# Altium PCB PMOD_KYPD.PcbDoc
Units mm, origin at the board's own origin, x right, y up, seen from the top; angles counter-clockwise.
Board outline 89.15 x 71.63 mm, 2 copper layers (Top Layer, Bottom Layer); 100 components, 14 nets, 240 pads, 0 vias.
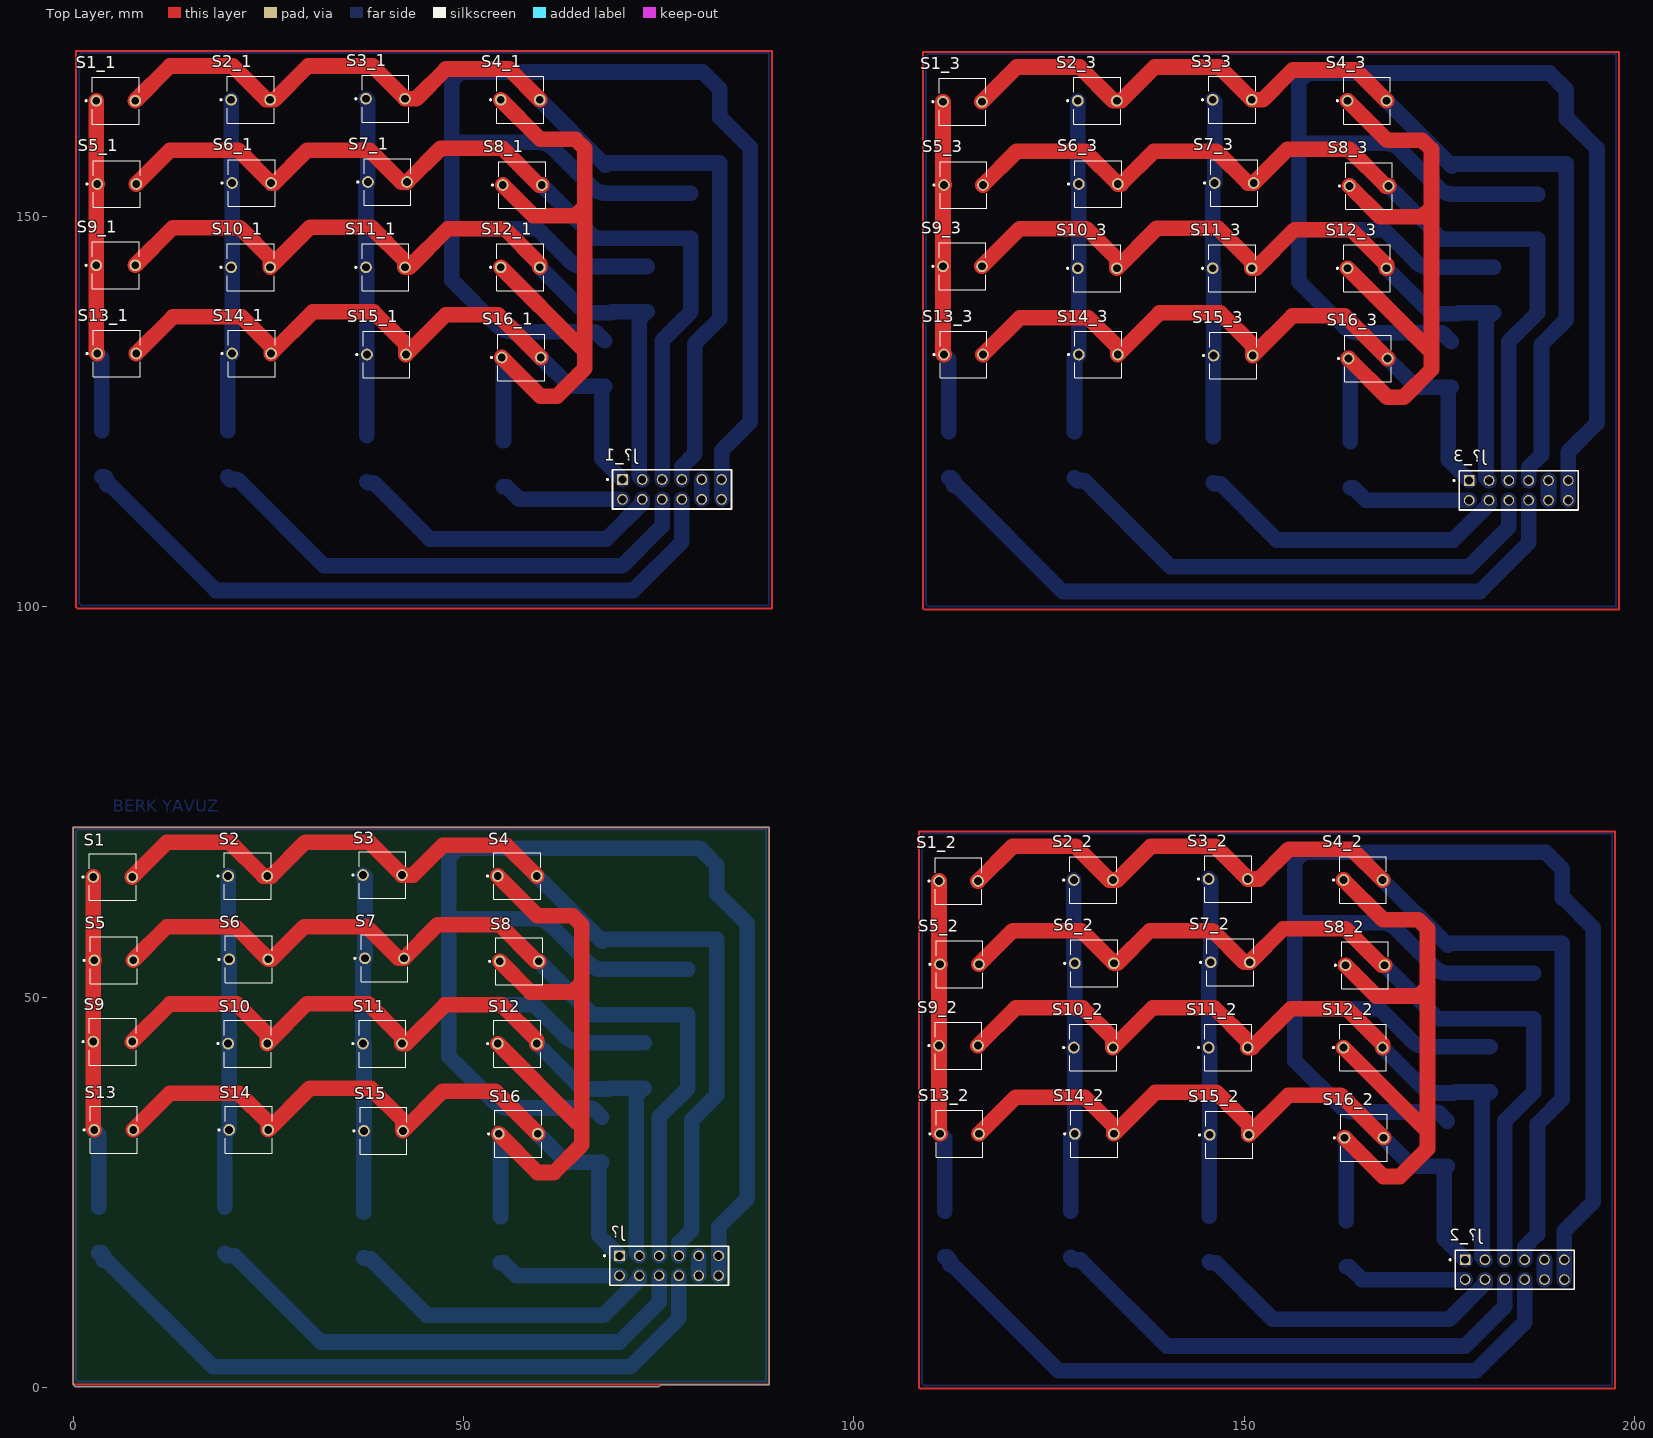
[diagram p0: Top Layer view]
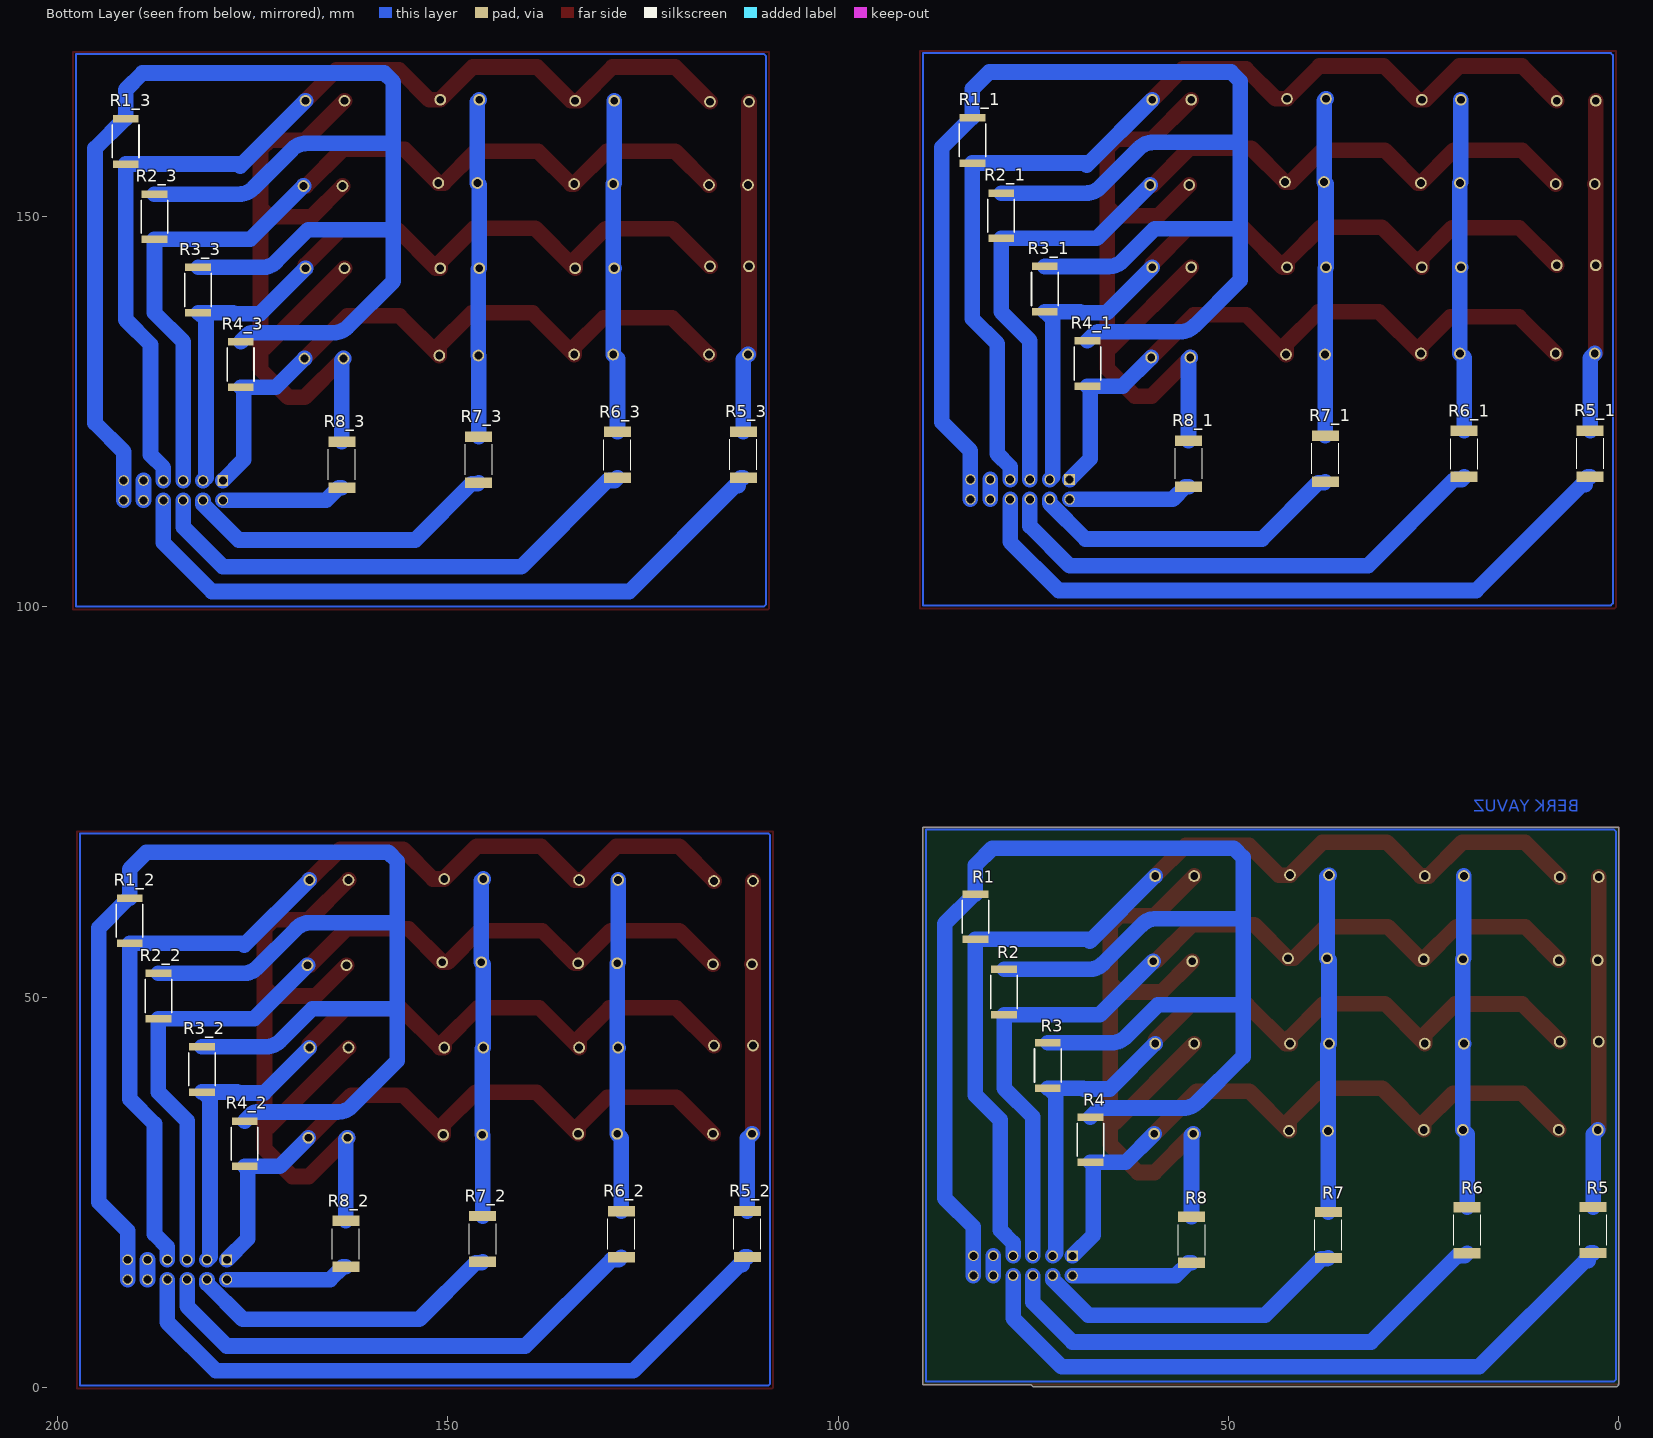
[diagram p1: Bottom Layer view, seen from below]

## Layer stack, top to bottom
Top Solder: solder mask 0.0102, Solder Resist, Dk 3.5
Top Layer: signal copper 0.0356
Dielectric 1: dielectric 0.32, FR-4, Dk 4.8
Bottom Layer: signal copper 0.0356
Bottom Solder: solder mask 0.0102, Solder Resist, Dk 3.5

## Board outline
0,0.381 0,71.755 89.154,71.755 89.154,0.381 75.311,0.381 75.057,0.127 0.254,0.127

## Design rules (kind name [scope] priority, off if disabled: settings)
Clearance [All] p1: gap=0.152 ignorepadtopadclearanceinfootprint=FALSE
HoleSize [All] p1: absolutevalues=TRUE maxlimit=5 minlimit=0.025 maxpercent=80.000 minpercent=20.000
PolygonConnect [All] p1: connectstyle=Relief reliefconductorwidth=0.254 reliefentries=4 polygonreliefangle="90 Angle" airgapwidth=0.254
RoutingVias [All] p1: holewidth=0.6 width=0.6 viastyle="Through Hole" minholewidth=0.2 minwidth=0.2 maxholewidth=0.9 maxwidth=1.27
SolderMaskExpansion [All] p1: expansion=0.102 istentingtop=FALSE
Width [All] p1: maxlimit=2 minlimit=0.152 preferedwidth=1
29 further rules are at their usual default settings.

## Classes and differential pairs
component class PMOD_KYPD: J? R1 R2 R3 R4 R5 R6 R7 R8 S1 S2 S3 S4 S5 S6 S7 S8 S9 S10 S11 S12 S13 S14 S15 S16

## Components (designator, comment, footprint, x,y, rotation, side; value= is the part's Value field where it differs from the comment)
J? "HTSW-106-07-L-D-LL" SAMTEC_HTSW-106-07-L-D-LL 76.327,15.621 r0 top
J?_1 "HTSW-106-07-L-D-LL" SAMTEC_HTSW-106-07-L-D-LL 76.708,115.062 r0 top (schematic designator J?)
J?_2 "HTSW-106-07-L-D-LL" SAMTEC_HTSW-106-07-L-D-LL 184.658,15.113 r0 top (schematic designator J?)
J?_3 "HTSW-106-07-L-D-LL" SAMTEC_HTSW-106-07-L-D-LL 185.166,114.935 r0 top (schematic designator J?)
R1 "CRGCQ2512J10K" FP-CRGCQ2512-IPC_C 82.423,60.325 r90 bottom value=10KΩ
R1_1 "CRGCQ2512J10K" FP-CRGCQ2512-IPC_C 82.804,159.766 r90 bottom value=10KΩ (schematic designator R1)
R1_2 "CRGCQ2512J10K" FP-CRGCQ2512-IPC_C 190.754,59.817 r90 bottom value=10KΩ (schematic designator R1)
R1_3 "CRGCQ2512J10K" FP-CRGCQ2512-IPC_C 191.262,159.639 r90 bottom value=10KΩ (schematic designator R1)
R2 "CRGCQ2512J10K" FP-CRGCQ2512-IPC_C 78.74,50.673 r90 bottom value=10KΩ
R2_1 "CRGCQ2512J10K" FP-CRGCQ2512-IPC_C 79.121,150.114 r90 bottom value=10KΩ (schematic designator R2)
R2_2 "CRGCQ2512J10K" FP-CRGCQ2512-IPC_C 187.071,50.165 r90 bottom value=10KΩ (schematic designator R2)
R2_3 "CRGCQ2512J10K" FP-CRGCQ2512-IPC_C 187.579,149.987 r90 bottom value=10KΩ (schematic designator R2)
R3 "CRGCQ2512J10K" FP-CRGCQ2512-IPC_C 73.152,41.275 r90 bottom value=10KΩ
R3_1 "CRGCQ2512J10K" FP-CRGCQ2512-IPC_C 73.533,140.716 r90 bottom value=10KΩ (schematic designator R3)
R3_2 "CRGCQ2512J10K" FP-CRGCQ2512-IPC_C 181.483,40.767 r90 bottom value=10KΩ (schematic designator R3)
R3_3 "CRGCQ2512J10K" FP-CRGCQ2512-IPC_C 181.991,140.589 r90 bottom value=10KΩ (schematic designator R3)
R4 "CRGCQ2512J10K" FP-CRGCQ2512-IPC_C 67.691,31.75 r90 bottom value=10KΩ
R4_1 "CRGCQ2512J10K" FP-CRGCQ2512-IPC_C 68.072,131.191 r90 bottom value=10KΩ (schematic designator R4)
R4_2 "CRGCQ2512J10K" FP-CRGCQ2512-IPC_C 176.022,31.242 r90 bottom value=10KΩ (schematic designator R4)
R4_3 "CRGCQ2512J10K" FP-CRGCQ2512-IPC_C 176.53,131.064 r90 bottom value=10KΩ (schematic designator R4)
R5 "470" RESC6332X70N 3.302,20.193 r270 bottom
R5_1 "470" RESC6332X70N 3.683,119.634 r270 bottom (schematic designator R5)
R5_2 "470" RESC6332X70N 111.633,19.685 r270 bottom (schematic designator R5)
R5_3 "470" RESC6332X70N 112.141,119.507 r270 bottom (schematic designator R5)
R6 "470" RESC6332X70N 19.431,20.17 r270 bottom
R6_1 "470" RESC6332X70N 19.812,119.611 r270 bottom (schematic designator R6)
R6_2 "470" RESC6332X70N 127.762,19.662 r270 bottom (schematic designator R6)
R6_3 "470" RESC6332X70N 128.27,119.484 r270 bottom (schematic designator R6)
R7 "470" RESC6332X70N 37.211,19.558 r270 bottom
R7_1 "470" RESC6332X70N 37.592,118.999 r270 bottom (schematic designator R7)
R7_2 "470" RESC6332X70N 145.542,19.05 r270 bottom (schematic designator R7)
R7_3 "470" RESC6332X70N 146.05,118.872 r270 bottom (schematic designator R7)
R8 "470" RESC6332X70N 54.737,18.923 r270 bottom
R8_1 "470" RESC6332X70N 55.118,118.364 r270 bottom (schematic designator R8)
R8_2 "470" RESC6332X70N 163.068,18.415 r270 bottom (schematic designator R8)
R8_3 "470" RESC6332X70N 163.576,118.237 r270 bottom (schematic designator R8)
S1 "1" SW_BUTT-2 5.08,65.405 r0 top
S1_1 "1" SW_BUTT-2 5.461,164.846 r0 top (schematic designator S1)
S1_2 "1" SW_BUTT-2 113.411,64.897 r0 top (schematic designator S1)
S1_3 "1" SW_BUTT-2 113.919,164.719 r0 top (schematic designator S1)
S2 "2" SW_BUTT-2 22.352,65.532 r0 top
S2_1 "2" SW_BUTT-2 22.733,164.973 r0 top (schematic designator S2)
S2_2 "2" SW_BUTT-2 130.683,65.024 r0 top (schematic designator S2)
S2_3 "2" SW_BUTT-2 131.191,164.846 r0 top (schematic designator S2)
S3 "3" SW_BUTT-2 39.624,65.659 r0 top
S3_1 "3" SW_BUTT-2 40.005,165.1 r0 top (schematic designator S3)
S3_2 "3" SW_BUTT-2 147.955,65.151 r0 top (schematic designator S3)
S3_3 "3" SW_BUTT-2 148.463,164.973 r0 top (schematic designator S3)
S4 "A" SW_BUTT-2 56.896,65.532 r0 top
S4_1 "A" SW_BUTT-2 57.277,164.973 r0 top (schematic designator S4)
S4_2 "A" SW_BUTT-2 165.227,65.024 r0 top (schematic designator S4)
S4_3 "A" SW_BUTT-2 165.735,164.846 r0 top (schematic designator S4)
S5 "4" SW_BUTT-2 5.207,54.737 r0 top
S5_1 "4" SW_BUTT-2 5.588,154.178 r0 top (schematic designator S5)
S5_2 "4" SW_BUTT-2 113.538,54.229 r0 top (schematic designator S5)
S5_3 "4" SW_BUTT-2 114.046,154.051 r0 top (schematic designator S5)
S6 "5" SW_BUTT-2 22.479,54.864 r0 top
S6_1 "5" SW_BUTT-2 22.86,154.305 r0 top (schematic designator S6)
S6_2 "5" SW_BUTT-2 130.81,54.356 r0 top (schematic designator S6)
S6_3 "5" SW_BUTT-2 131.318,154.178 r0 top (schematic designator S6)
S7 "6" SW_BUTT-2 39.878,54.991 r0 top
S7_1 "6" SW_BUTT-2 40.259,154.432 r0 top (schematic designator S7)
S7_2 "6" SW_BUTT-2 148.209,54.483 r0 top (schematic designator S7)
S7_3 "6" SW_BUTT-2 148.717,154.305 r0 top (schematic designator S7)
S8 "B" SW_BUTT-2 57.15,54.61 r0 top
S8_1 "B" SW_BUTT-2 57.531,154.051 r0 top (schematic designator S8)
S8_2 "B" SW_BUTT-2 165.481,54.102 r0 top (schematic designator S8)
S8_3 "B" SW_BUTT-2 165.989,153.924 r0 top (schematic designator S8)
S9 "7" SW_BUTT-2 5.08,44.323 r0 top
S9_1 "7" SW_BUTT-2 5.461,143.764 r0 top (schematic designator S9)
S9_2 "7" SW_BUTT-2 113.411,43.815 r0 top (schematic designator S9)
S9_3 "7" SW_BUTT-2 113.919,143.637 r0 top (schematic designator S9)
S10 "8" SW_BUTT-2 22.352,44.069 r0 top
S10_1 "8" SW_BUTT-2 22.733,143.51 r0 top (schematic designator S10)
S10_2 "8" SW_BUTT-2 130.683,43.561 r0 top (schematic designator S10)
S10_3 "8" SW_BUTT-2 131.191,143.383 r0 top (schematic designator S10)
S11 "9" SW_BUTT-2 39.624,44.069 r0 top
S11_1 "9" SW_BUTT-2 40.005,143.51 r0 top (schematic designator S11)
S11_2 "9" SW_BUTT-2 147.955,43.561 r0 top (schematic designator S11)
S11_3 "9" SW_BUTT-2 148.463,143.383 r0 top (schematic designator S11)
S12 "C" SW_BUTT-2 56.896,44.069 r0 top
S12_1 "C" SW_BUTT-2 57.277,143.51 r0 top (schematic designator S12)
S12_2 "C" SW_BUTT-2 165.227,43.561 r0 top (schematic designator S12)
S12_3 "C" SW_BUTT-2 165.735,143.383 r0 top (schematic designator S12)
S13 "*" SW_BUTT-2 5.207,33.02 r0 top
S13_1 "*" SW_BUTT-2 5.588,132.461 r0 top (schematic designator S13)
S13_2 "*" SW_BUTT-2 113.538,32.512 r0 top (schematic designator S13)
S13_3 "*" SW_BUTT-2 114.046,132.334 r0 top (schematic designator S13)
S14 "0" SW_BUTT-2 22.479,33.02 r0 top
S14_1 "0" SW_BUTT-2 22.86,132.461 r0 top (schematic designator S14)
S14_2 "0" SW_BUTT-2 130.81,32.512 r0 top (schematic designator S14)
S14_3 "0" SW_BUTT-2 131.318,132.334 r0 top (schematic designator S14)
S15 "#" SW_BUTT-2 39.751,32.893 r0 top
S15_1 "#" SW_BUTT-2 40.132,132.334 r0 top (schematic designator S15)
S15_2 "#" SW_BUTT-2 148.082,32.385 r0 top (schematic designator S15)
S15_3 "#" SW_BUTT-2 148.59,132.207 r0 top (schematic designator S15)
S16 "D" SW_BUTT-2 57.023,32.512 r0 top
S16_1 "D" SW_BUTT-2 57.404,131.953 r0 top (schematic designator S16)
S16_2 "D" SW_BUTT-2 165.354,32.004 r0 top (schematic designator S16)
S16_3 "D" SW_BUTT-2 165.862,131.826 r0 top (schematic designator S16)

## Footprints (in the part's own frame and the unit in brackets; to place one, negate y for a bottom-side part, rotate by r counter-clockwise, add the part's x,y. Pads: shape width x height; smd on the part's side, far side on the other; paste and mask are expansions set on the pad)
FP-CRGCQ2512-IPC_C [mm]
  rect 0.958x3.306 smd paste+0 mask+0: 1(-2.902,0) 2(2.902,0)
  silkscreen extent -2.12,-1.7 2.12,1.7, body extent -3.17,-1.6 3.17,1.6, height 0.65
RESC6332X70N [mm]
  rect 1.33x3.46 smd: 1(-2.944,0) 2(2.944,0)
  silkscreen extent -1.96,-1.73 1.96,1.73, body extent -3.15,-1.6 3.15,1.6, height 0.7
SAMTEC_HTSW-106-07-L-D-LL [mm]
  rect 1.37x1.37 hole 1.02: 01(-6.35,1.27)
  round 1.37 hole 1.02: 02(-6.35,-1.27) 03(-3.81,1.27) 04(-3.81,-1.27) 05(-1.27,1.27) 06(-1.27,-1.27) 07(1.27,1.27) 08(1.27,-1.27) 09(3.81,1.27) 10(3.81,-1.27) 11(6.35,1.27) 12(6.35,-1.27)
  silkscreen extent -8.37,-2.51 7.62,2.51
SW_BUTT-2 [mm]
  round 1.508 hole 1: 1(-2.5,0) 2(2.5,0)
  silkscreen extent -3.9,-3 3,3

## Part data
J? J?_1 J?_2 J?_3: Package=None, Availability=Unavailable, MF="{'manufacturer': u'Samtec'}", MP=HTSW-106-07-L-D-LL, Price=None
R1 R1_1 R1_2 R1_3 R2 R2_1 R2_2 R2_3 R3 R3_1 R3_2 R3_3 R4 R4_1 R4_2 R4_3: library part CMP-03211-000044-1, "CRGCQ2512 10KΩ 1W ±100ppm/°C 5%200V", Manufacturer="TE Connectivity", Package=CRGCQ2512, Power Rating=1W, Resistance=10KΩ, Temperature="-55°C to +155°C", Temperature Coefficient=±100ppm/°C, Temperature Range High=+155°C, Temperature Range Low=-55°C, Tolerance=0.05, Voltage Rating=200V, Automotive=Yes, Automotive Grade="Grade 0", Category=Res, ComponentLink2Description=Datasheet, ComponentLink2URL=https://www.te.com/commerce/DocumentDelivery/DDEController?Action=showdoc&DocId=Data+Sheet%7F1773204-3%7F1%7Fpdf%7FEnglish%7FENG_DS_1773204-3_1.pdf%7F4-2176349-923, Composition="Thick Film", Device Class L1="Passive Components", Device Class L2=Resistors, Device Class L3="Chip SMD Resistors", Height=0.65mm, Ipc Land Pattern Name=RESC635320X55, Lead Free=Yes, Manufacturer Part Number=CRGCQ2512J10K, Octopart=https://octopart.com/crgcq2512j10k-te+connectivity-91018617, RoHS=TRUE, Series=CRGCQ
R5 R5_1 R5_2 R5_3 R6 R6_1 R6_2 R6_3 R7 R7_1 R7_2 R7_3 R8 R8_1 R8_2 R8_3: library part RMCF2512FT470R, Package=None, Availability=Unavailable, MF="{'manufacturer': u'Stackpole Electronics Inc'}", MP=RMCF2512FT470R, Price=None
S1 S1_1 S1_2 S1_3 S2 S2_1 S2_2 S2_3 S3 S3_1 S3_2 S3_3 S4 S4_1 S4_2 S4_3 S5 S5_1 S5_2 S5_3 S6 S6_1 S6_2 S6_3 S7 S7_1 S7_2 S7_3 S8 S8_1 S8_2 S8_3 S9 S9_1 S9_2 S9_3 S10 S10_1 S10_2 S10_3 S11 S11_1 S11_2 S11_3 S12 S12_1 S12_2 S12_3 S13 S13_1 S13_2 S13_3 S14 S14_1 S14_2 S14_3 S15 S15_1 S15_2 S15_3 S16 S16_1 S16_2 S16_3: library part BUTT-2, "Tactile Switches MINI PUSH BUTTON SWITCH 2-PIN QTY. 4", Package=None, Availability=Unavailable, MF="{'manufacturer': u'Gravitech'}", MP=BUTT-2, Price=None

## Nets (pads, with @x,y where several pads share a name; then routed paths per layer and width w, separated by ;. In a path a pad name is that pad's centre, name@x,y a point inside that pad or via, vN(x,y) a via of type N, cw(c..) or ccw(c..) an arc to the next point about the centre after c; other vN are vias at no path point)
COL1: J?.08 R5.2 | length 88.4
  Bottom Layer w2: R5.2 3.602,17.249 3.937,16.914 3.937,16.233 ; 4.332,16.233 17.898,2.667 71.374,2.667 77.597,8.89 J?.08
COL2: J?.06 R6.2 | length 65.9
  Bottom Layer w2: R6.2 19.766,16.891 20.495,16.891 20.518,16.868 20.715,16.868 31.741,5.842 69.977,5.842 75.057,10.922 J?.06
COL3: J?.04 R7.2 | length 40.7
  Bottom Layer w2: R7.2 37.338,16.487 38.114,16.487 45.33,9.271 67.94,9.271 72.517,13.848 J?.04
COL4: J?.02 R8.2 | length 15.9
  Bottom Layer w2: R8.2 55.132,15.979 56.76,14.351 J?.02
GND: J?.09 J?.10 | length 2.5
  Bottom Layer w2: J?.10 J?.09
NetR5_1: R5.1 S1.1 S5.1 S9.1 S13.1 | length 42.7
  Top Layer w2: S1.1 2.58,55.044 ccw(c3.014,55.044) S5.1 2.58,54.61 S9.1 2.58,33.147 S13.1
  Bottom Layer w2: S13.1 3.302,32.425 R5.1
NetR6_1: R6.1 S2.1 S6.1 S10.1 S14.1 | length 42.8
  Bottom Layer w2: R6.1 19.431,32.472 S14.1 19.979,43.942 S10.1 19.979,44.196 S6.1 19.852,54.991 S2.1
NetR7_1: R7.1 S3.1 S7.1 S11.1 S15.1 | length 43.4
  Bottom Layer w2: S3.1 37.378,65.405 S7.1 37.124,54.737 S11.1 37.251,43.942 S15.1 37.211,32.853 R7.1
NetR8_1: R8.1 S4.1 S8.1 S12.1 S16.1 | length 94
  Top Layer w2: S12.1 64.556,33.909 65.151,33.909 ; S4.1 59.476,60.452 63.979,60.452 65.151,59.28 65.151,51.845 ; S16.1 59.476,27.559 61.595,27.559 65.151,31.115 65.151,33.909 ; S8.1 58.587,50.673 63.979,50.673 65.151,51.845 ; 65.151,33.909 65.151,51.845
  Bottom Layer w2: S16.1 54.737,32.298 R8.1
R1: J?.07 R1.1 S1.2 S2.2 S3.2 S4.2 | length 131.3
  Top Layer w2: S1.2 12.025,69.85 20.066,69.85 24.384,65.532 S2.2 25.4,65.532 29.718,69.85 37.973,69.85 42.124,65.699 S3.2 43.561,65.659 47.371,69.469 55.459,69.469 S4.2
  Bottom Layer w2: S4.2 67.759,57.169 68.013,57.423 R1.1 82.423,37.465 79.248,34.29 79.248,20.193 77.597,18.542 J?.07
R2: J?.05 R2.1 S5.2 S6.2 S7.2 S8.2 | length 117
  Top Layer w2: S5.2 12.025,59.055 20.788,59.055 S6.2 25.4,54.864 29.591,59.055 37.592,59.055 41.656,54.991 S7.2 46.696,59.309 54.61,59.309 59.309,54.61 S8.2
  Bottom Layer w2: S8.2 66.489,47.771 R2.1 78.74,38.354 75.057,34.671 J?.05
R3: J?.03 R3.1 S9.2 S10.2 S11.2 S12.2 | length 103.9
  Top Layer w2: S9.2 12.406,49.149 20.955,49.149 24.852,45.252 S10.2 29.972,49.189 37.806,49.189 42.124,44.871 S11.2 42.672,44.069 47.625,49.022 54.864,49.022 59.396,44.49 S12.2
  Bottom Layer w2: S12.2 65.21,38.255 68.521,38.255 68.639,38.373 R3.1@73.02,38.373 ; J?.03 72.136,17.272 72.136,37.489 R3.1@73.02,38.373 ; R3.1 R3.1@73.02,38.373
R4: J?.01 R4.1 S13.2 S14.2 S15.2 S16.2 | length 88.8
  Top Layer w2: S13.2 12.406,37.719 21.209,37.719 24.979,33.949 S14.2 30.313,38.354 38.1,38.354 42.251,34.203 S15.2 47.331,37.973 54.062,37.973 S16.2
  Bottom Layer w2: S16.2 63.187,28.848 R4.1 67.31,28.467 67.31,19.558 J?.01
VCC: J?.11 J?.12 R1.2 R2.2 R3.2 R4.2 | length 199.6
  Bottom Layer w2: R4.2 66.785,35.558 ccw(c66.167,34.94) 66.167,35.814 55.789,35.814 cw(c55.789,38.354) 53.993,36.558 48.133,42.418 48.133,49.149 ; R3.2 64.952,44.177 cw(c64.952,46.717) 63.156,44.921 59.055,49.022 48.44,49.022 cw(c48.44,49.456) 48.133,49.149 ; R2.2 67.873,53.575 cw(c67.873,56.115) 66.077,54.319 61.069,59.327 ccw(c59.273,57.531) 59.273,60.071 48.133,60.071 ; J?.12 J?.11 82.677,20.574 86.36,24.257 86.36,59.422 82.555,63.227 R1.2 82.423,66.929 80.264,69.088 49.305,69.088 48.133,67.916 48.133,60.071 ; 48.133,49.149 48.133,60.071
pads on no net: J?_1.01 J?_1.02 J?_1.03 J?_1.04 J?_1.05 J?_1.06 J?_1.07 J?_1.08 J?_1.09 J?_1.10 J?_1.11 J?_1.12 J?_2.01 J?_2.02 J?_2.03 J?_2.04 J?_2.05 J?_2.06 J?_2.07 J?_2.08 J?_2.09 J?_2.10 J?_2.11 J?_2.12 J?_3.01 J?_3.02 J?_3.03 J?_3.04 J?_3.05 J?_3.06 J?_3.07 J?_3.08 J?_3.09 J?_3.10 J?_3.11 J?_3.12 R1_1.1 R1_1.2 R1_2.1 R1_2.2 R1_3.1 R1_3.2 R2_1.1 R2_1.2 R2_2.1 R2_2.2 R2_3.1 R2_3.2 R3_1.1 R3_1.2 R3_2.1 R3_2.2 R3_3.1 R3_3.2 R4_1.1 R4_1.2 R4_2.1 R4_2.2 R4_3.1 R4_3.2 R5_1.1 R5_1.2 R5_2.1 R5_2.2 R5_3.1 R5_3.2 R6_1.1 R6_1.2 R6_2.1 R6_2.2 R6_3.1 R6_3.2 R7_1.1 R7_1.2 R7_2.1 R7_2.2 R7_3.1 R7_3.2 R8_1.1 R8_1.2 R8_2.1 R8_2.2 R8_3.1 R8_3.2 S1_1.1 S1_1.2 S1_2.1 S1_2.2 S1_3.1 S1_3.2 S2_1.1 S2_1.2 S2_2.1 S2_2.2 S2_3.1 S2_3.2 S3_1.1 S3_1.2 S3_2.1 S3_2.2 S3_3.1 S3_3.2 S4_1.1 S4_1.2 S4_2.1 S4_2.2 S4_3.1 S4_3.2 S5_1.1 S5_1.2 S5_2.1 S5_2.2 S5_3.1 S5_3.2 S6_1.1 S6_1.2 S6_2.1 S6_2.2 S6_3.1 S6_3.2 S7_1.1 S7_1.2 S7_2.1 S7_2.2 S7_3.1 S7_3.2 S8_1.1 S8_1.2 S8_2.1 S8_2.2 S8_3.1 S8_3.2 S9_1.1 S9_1.2 S9_2.1 S9_2.2 S9_3.1 S9_3.2 S10_1.1 S10_1.2 S10_2.1 S10_2.2 S10_3.1 S10_3.2 S11_1.1 S11_1.2 S11_2.1 S11_2.2 S11_3.1 S11_3.2 S12_1.1 S12_1.2 S12_2.1 S12_2.2 S12_3.1 S12_3.2 S13_1.1 S13_1.2 S13_2.1 S13_2.2 S13_3.1 S13_3.2 S14_1.1 S14_1.2 S14_2.1 S14_2.2 S14_3.1 S14_3.2 S15_1.1 S15_1.2 S15_2.1 S15_2.2 S15_3.1 S15_3.2 S16_1.1 S16_1.2 S16_2.1 S16_2.2 S16_3.1 S16_3.2
copper on no net: | length 5786.4
  Top Layer w0.254: 0,0.53 0.149,0.381 75.311,0.381 89.154,0.381 89.154,71.755 0,71.755 0,0.53 ; 0.381,99.971 0.381,171.196 89.535,171.196 89.535,99.822 75.692,99.822 0.53,99.822 0.381,99.971 ; 108.331,0.022 108.331,71.247 197.485,71.247 197.485,-0.127 183.642,-0.127 108.48,-0.127 108.331,0.022 ; 108.839,99.844 108.839,171.069 197.993,171.069 197.993,99.695 184.15,99.695 108.988,99.695 108.839,99.844
  Top Layer w2: 2.961,164.846 2.961,154.485 ccw(c3.395,154.485) 3.088,154.178 2.961,154.051 2.961,143.764 2.961,132.588 3.088,132.461 ; 7.961,143.764 12.787,148.59 21.336,148.59 25.233,144.693 25.233,143.51 30.353,148.63 38.187,148.63 42.505,144.312 42.505,143.51 43.053,143.51 48.006,148.463 55.245,148.463 59.777,143.931 59.777,143.51 ; 7.961,164.846 12.406,169.291 20.447,169.291 24.765,164.973 25.233,164.973 25.781,164.973 30.099,169.291 38.354,169.291 42.505,165.14 42.505,165.1 43.942,165.1 47.752,168.91 55.84,168.91 59.777,164.973 ; 8.088,132.461 12.787,137.16 21.59,137.16 25.36,133.39 25.36,132.461 30.694,137.795 38.481,137.795 42.632,133.644 42.632,132.334 47.712,137.414 54.443,137.414 59.904,131.953 ; 8.088,154.178 12.406,158.496 21.169,158.496 25.36,154.305 25.781,154.305 29.972,158.496 37.973,158.496 42.037,154.432 42.759,154.432 47.077,158.75 54.991,158.75 59.69,154.051 60.031,154.051 ; 54.777,143.51 64.937,133.35 65.532,133.35 ; 54.777,164.973 59.857,159.893 64.36,159.893 65.532,158.721 65.532,151.286 ; 54.904,131.953 59.857,127 61.976,127 65.532,130.556 65.532,133.35 ; 55.031,154.051 58.968,150.114 64.36,150.114 65.532,151.286 ; 110.911,64.897 110.911,54.536 ccw(c111.345,54.536) 111.038,54.229 110.911,54.102 110.911,43.815 110.911,32.639 111.038,32.512 ; 111.419,164.719 111.419,154.358 ccw(c111.853,154.358) 111.546,154.051 111.419,153.924 111.419,143.637 111.419,132.461 111.546,132.334 ; 115.911,43.815 120.737,48.641 129.286,48.641 133.183,44.744 133.183,43.561 138.303,48.681 146.137,48.681 150.455,44.363 150.455,43.561 151.003,43.561 155.956,48.514 163.195,48.514 167.727,43.982 167.727,43.561 ; 115.911,64.897 120.356,69.342 128.397,69.342 132.715,65.024 133.183,65.024 133.731,65.024 138.049,69.342 146.304,69.342 150.455,65.191 150.455,65.151 151.892,65.151 155.702,68.961 163.79,68.961 167.727,65.024 ; 116.038,32.512 120.737,37.211 129.54,37.211 133.31,33.441 133.31,32.512 138.644,37.846 146.431,37.846 150.582,33.695 150.582,32.385 155.662,37.465 162.393,37.465 167.854,32.004 ; 116.038,54.229 120.356,58.547 129.119,58.547 133.31,54.356 133.731,54.356 137.922,58.547 145.923,58.547 149.987,54.483 150.709,54.483 155.027,58.801 162.941,58.801 167.64,54.102 167.981,54.102 ; 116.419,143.637 121.245,148.463 129.794,148.463 133.691,144.566 133.691,143.383 138.811,148.503 146.645,148.503 150.963,144.185 150.963,143.383 151.511,143.383 156.464,148.336 163.703,148.336 168.235,143.804 168.235,143.383 ; 116.419,164.719 120.864,169.164 128.905,169.164 133.223,164.846 133.691,164.846 134.239,164.846 138.557,169.164 146.812,169.164 150.963,165.013 150.963,164.973 152.4,164.973 156.21,168.783 164.298,168.783 168.235,164.846 ; 116.546,132.334 121.245,137.033 130.048,137.033 133.818,133.263 133.818,132.334 139.152,137.668 146.939,137.668 151.09,133.517 151.09,132.207 156.17,137.287 162.901,137.287 168.362,131.826 ; 116.546,154.051 120.864,158.369 129.627,158.369 133.818,154.178 134.239,154.178 138.43,158.369 146.431,158.369 150.495,154.305 151.217,154.305 155.535,158.623 163.449,158.623 168.148,153.924 168.489,153.924 ; 162.727,43.561 172.887,33.401 173.482,33.401 ; 162.727,65.024 167.807,59.944 172.31,59.944 173.482,58.772 173.482,51.337 ; 162.854,32.004 167.807,27.051 169.926,27.051 173.482,30.607 173.482,33.401 ; 162.981,54.102 166.918,50.165 172.31,50.165 173.482,51.337 ; 163.235,143.383 173.395,133.223 173.99,133.223 ; 163.235,164.846 168.315,159.766 172.818,159.766 173.99,158.594 173.99,151.159 ; 163.362,131.826 168.315,126.873 170.434,126.873 173.99,130.429 173.99,133.223 ; 163.489,153.924 167.426,149.987 172.818,149.987 173.99,151.159 ; 65.532,133.35 65.532,151.286 ; 173.482,33.401 173.482,51.337 ; 173.99,133.223 173.99,151.159
  Bottom Layer w0.254: 0.381,1.016 0.381,71.247 0.635,71.501 88.773,71.501 88.773,0.762 0.635,0.762 0.381,1.016 ; 0.762,100.457 0.762,170.688 1.016,170.942 89.154,170.942 89.154,100.203 1.016,100.203 0.762,100.457 ; 108.712,0.508 108.966,0.254 197.104,0.254 197.104,70.993 108.966,70.993 108.712,70.739 108.712,0.508 ; 109.22,100.33 109.474,100.076 197.612,100.076 197.612,170.815 109.474,170.815 109.22,170.561 109.22,100.33
  Bottom Layer w2: 3.088,132.461 3.683,131.866 3.683,122.578 ; 3.683,116.69 3.983,116.69 4.318,116.355 4.318,115.674 ; 4.713,115.674 18.279,102.108 71.755,102.108 77.978,108.331 77.978,113.792 ; 19.812,116.667 20.147,116.332 20.876,116.332 20.899,116.309 21.096,116.309 32.122,105.283 70.358,105.283 75.438,110.363 75.438,113.792 ; 19.812,122.555 19.812,131.913 20.36,132.461 20.36,143.383 20.233,143.51 20.36,143.637 20.36,154.305 20.233,154.432 20.233,164.973 ; 37.505,165.1 37.759,164.846 37.759,154.432 37.505,154.178 37.505,143.51 37.632,143.383 37.632,132.334 37.592,132.294 37.592,121.943 ; 37.592,116.055 37.719,115.928 38.495,115.928 45.711,108.712 68.321,108.712 72.898,113.289 72.898,113.792 ; 54.904,131.953 55.118,131.739 55.118,121.308 ; 55.118,115.42 55.513,115.42 57.141,113.792 70.358,113.792 ; 59.777,143.51 65.591,137.696 68.902,137.696 69.02,137.814 73.401,137.814 ; 59.777,164.973 68.14,156.61 68.394,156.864 82.804,156.864 82.804,136.906 79.629,133.731 79.629,119.634 77.978,117.983 77.978,116.332 ; 59.904,131.953 63.568,128.289 68.072,128.289 67.691,127.908 67.691,118.999 70.358,116.332 ; 60.031,154.051 66.87,147.212 79.121,147.212 79.121,137.795 75.438,134.112 75.438,116.332 ; 68.072,134.093 67.166,134.999 ccw(c66.548,134.381) 66.548,135.255 56.17,135.255 cw(c56.17,137.795) 54.374,135.999 48.514,141.859 48.514,148.59 ; 72.898,116.332 72.517,116.713 72.517,136.93 73.401,137.814 ; 73.533,137.814 73.401,137.814 ; 73.533,143.618 65.333,143.618 cw(c65.333,146.158) 63.537,144.362 59.436,148.463 48.821,148.463 cw(c48.821,148.897) 48.514,148.59 ; 79.121,153.016 68.254,153.016 cw(c68.254,155.556) 66.458,153.76 61.45,158.768 ccw(c59.654,156.972) 59.654,159.512 48.514,159.512 ; 80.518,113.792 80.518,116.332 ; 83.058,113.792 83.058,116.332 83.058,120.015 86.741,123.698 86.741,158.863 82.936,162.668 82.804,162.668 82.804,166.37 80.645,168.529 49.686,168.529 48.514,167.357 48.514,159.512 ; 111.038,32.512 111.633,31.917 111.633,22.629 ; 111.546,132.334 112.141,131.739 112.141,122.451 ; 111.633,16.741 111.933,16.741 112.268,16.406 112.268,15.725 ; 112.141,116.563 112.441,116.563 112.776,116.228 112.776,115.547 ; 112.663,15.725 126.229,2.159 179.705,2.159 185.928,8.382 185.928,13.843 ; 113.171,115.547 126.737,101.981 180.213,101.981 186.436,108.204 186.436,113.665 ; 127.762,16.718 128.097,16.383 128.826,16.383 128.849,16.36 129.046,16.36 140.072,5.334 178.308,5.334 183.388,10.414 183.388,13.843 ; 127.762,22.606 127.762,31.964 128.31,32.512 128.31,43.434 128.183,43.561 128.31,43.688 128.31,54.356 128.183,54.483 128.183,65.024 ; 128.27,116.54 128.605,116.205 129.334,116.205 129.357,116.182 129.554,116.182 140.58,105.156 178.816,105.156 183.896,110.236 183.896,113.665 ; 128.27,122.428 128.27,131.786 128.818,132.334 128.818,143.256 128.691,143.383 128.818,143.51 128.818,154.178 128.691,154.305 128.691,164.846 ; 145.455,65.151 145.709,64.897 145.709,54.483 145.455,54.229 145.455,43.561 145.582,43.434 145.582,32.385 145.542,32.345 145.542,21.994 ; 145.542,16.106 145.669,15.979 146.445,15.979 153.661,8.763 176.271,8.763 180.848,13.34 180.848,13.843 ; 145.963,164.973 146.217,164.719 146.217,154.305 145.963,154.051 145.963,143.383 146.09,143.256 146.09,132.207 146.05,132.167 146.05,121.816 ; 146.05,115.928 146.177,115.801 146.953,115.801 154.169,108.585 176.779,108.585 181.356,113.162 181.356,113.665 ; 162.854,32.004 163.068,31.79 163.068,21.359 ; 163.068,15.471 163.463,15.471 165.091,13.843 178.308,13.843 ; 163.362,131.826 163.576,131.612 163.576,121.181 ; 163.576,115.293 163.971,115.293 165.599,113.665 178.816,113.665 ; 167.727,43.561 173.541,37.747 176.852,37.747 176.97,37.865 181.351,37.865 ; 167.727,65.024 176.09,56.661 176.344,56.915 190.754,56.915 190.754,36.957 187.579,33.782 187.579,19.685 185.928,18.034 185.928,16.383 ; 167.854,32.004 171.518,28.34 176.022,28.34 175.641,27.959 175.641,19.05 178.308,16.383 ; 167.981,54.102 174.82,47.263 187.071,47.263 187.071,37.846 183.388,34.163 183.388,16.383 ; 168.235,143.383 174.049,137.569 177.36,137.569 177.478,137.687 181.859,137.687 ; 168.235,164.846 176.598,156.483 176.852,156.737 191.262,156.737 191.262,136.779 188.087,133.604 188.087,119.507 186.436,117.856 186.436,116.205 ; 168.362,131.826 172.026,128.162 176.53,128.162 176.149,127.781 176.149,118.872 178.816,116.205 ; 168.489,153.924 175.328,147.085 187.579,147.085 187.579,137.668 183.896,133.985 183.896,116.205 ; 176.022,34.144 175.116,35.05 ccw(c174.498,34.432) 174.498,35.306 164.12,35.306 cw(c164.12,37.846) 162.324,36.05 156.464,41.91 156.464,48.641 ; 176.53,133.966 175.624,134.872 ccw(c175.006,134.254) 175.006,135.128 164.628,135.128 cw(c164.628,137.668) 162.832,135.872 156.972,141.732 156.972,148.463 ; 180.848,16.383 180.467,16.764 180.467,36.981 181.351,37.865 ; 181.356,116.205 180.975,116.586 180.975,136.803 181.859,137.687 ; 181.483,37.865 181.351,37.865 ; 181.483,43.669 173.283,43.669 cw(c173.283,46.209) 171.487,44.413 167.386,48.514 156.771,48.514 cw(c156.771,48.948) 156.464,48.641 ; 181.991,137.687 181.859,137.687 ; 181.991,143.491 173.791,143.491 cw(c173.791,146.031) 171.995,144.235 167.894,148.336 157.279,148.336 cw(c157.279,148.77) 156.972,148.463 ; 187.071,53.067 176.204,53.067 cw(c176.204,55.607) 174.408,53.811 169.4,58.819 ccw(c167.604,57.023) 167.604,59.563 156.464,59.563 ; 187.579,152.889 176.712,152.889 cw(c176.712,155.429) 174.916,153.633 169.908,158.641 ccw(c168.112,156.845) 168.112,159.385 156.972,159.385 ; 188.468,13.843 188.468,16.383 ; 188.976,113.665 188.976,116.205 ; 191.008,13.843 191.008,16.383 191.008,20.066 194.691,23.749 194.691,58.914 190.886,62.719 190.754,62.719 190.754,66.421 188.595,68.58 157.636,68.58 156.464,67.408 156.464,59.563 ; 191.516,113.665 191.516,116.205 191.516,119.888 195.199,123.571 195.199,158.736 191.394,162.541 191.262,162.541 191.262,166.243 189.103,168.402 158.144,168.402 156.972,167.23 156.972,159.385 ; 48.514,148.59 48.514,159.512 ; 156.464,48.641 156.464,59.563 ; 156.972,148.463 156.972,159.385

## Other copper
Bottom Layer:
  text "BERK YAVUZ" at 5.08,73.787 h1.52

## Text inside footprints (layer, text, board x,y; h text height)
S1: Mechanical 13 "Check the physical device before using the layout." at 1.88,58.995 h0.3; Mechanical 13 "Footprint dimensions taken from a different datasheet." at 1.88,59.605 h0.3
S1_1: Mechanical 13 "Footprint dimensions taken from a different datasheet." at 2.261,159.046 h0.3; Mechanical 13 "Check the physical device before using the layout." at 2.261,158.436 h0.3
S1_2: Mechanical 13 "Footprint dimensions taken from a different datasheet." at 110.211,59.097 h0.3; Mechanical 13 "Check the physical device before using the layout." at 110.211,58.487 h0.3
S1_3: Mechanical 13 "Footprint dimensions taken from a different datasheet." at 110.719,158.919 h0.3; Mechanical 13 "Check the physical device before using the layout." at 110.719,158.309 h0.3
S2: Mechanical 13 "Footprint dimensions taken from a different datasheet." at 19.152,59.732 h0.3; Mechanical 13 "Check the physical device before using the layout." at 19.152,59.122 h0.3
S2_1: Mechanical 13 "Check the physical device before using the layout." at 19.533,158.563 h0.3; Mechanical 13 "Footprint dimensions taken from a different datasheet." at 19.533,159.173 h0.3
S2_2: Mechanical 13 "Check the physical device before using the layout." at 127.483,58.614 h0.3; Mechanical 13 "Footprint dimensions taken from a different datasheet." at 127.483,59.224 h0.3
S2_3: Mechanical 13 "Check the physical device before using the layout." at 127.991,158.436 h0.3; Mechanical 13 "Footprint dimensions taken from a different datasheet." at 127.991,159.046 h0.3
S3: Mechanical 13 "Footprint dimensions taken from a different datasheet." at 36.424,59.859 h0.3; Mechanical 13 "Check the physical device before using the layout." at 36.424,59.249 h0.3
S3_1: Mechanical 13 "Check the physical device before using the layout." at 36.805,158.69 h0.3; Mechanical 13 "Footprint dimensions taken from a different datasheet." at 36.805,159.3 h0.3
S3_2: Mechanical 13 "Check the physical device before using the layout." at 144.755,58.741 h0.3; Mechanical 13 "Footprint dimensions taken from a different datasheet." at 144.755,59.351 h0.3
S3_3: Mechanical 13 "Check the physical device before using the layout." at 145.263,158.563 h0.3; Mechanical 13 "Footprint dimensions taken from a different datasheet." at 145.263,159.173 h0.3
S4: Mechanical 13 "Check the physical device before using the layout." at 53.696,59.122 h0.3; Mechanical 13 "Footprint dimensions taken from a different datasheet." at 53.696,59.732 h0.3
S4_1: Mechanical 13 "Check the physical device before using the layout." at 54.077,158.563 h0.3; Mechanical 13 "Footprint dimensions taken from a different datasheet." at 54.077,159.173 h0.3
S4_2: Mechanical 13 "Check the physical device before using the layout." at 162.027,58.614 h0.3; Mechanical 13 "Footprint dimensions taken from a different datasheet." at 162.027,59.224 h0.3
S4_3: Mechanical 13 "Check the physical device before using the layout." at 162.535,158.436 h0.3; Mechanical 13 "Footprint dimensions taken from a different datasheet." at 162.535,159.046 h0.3
S5: Mechanical 13 "Footprint dimensions taken from a different datasheet." at 2.007,48.937 h0.3; Mechanical 13 "Check the physical device before using the layout." at 2.007,48.327 h0.3
S5_1: Mechanical 13 "Check the physical device before using the layout." at 2.388,147.768 h0.3; Mechanical 13 "Footprint dimensions taken from a different datasheet." at 2.388,148.378 h0.3
S5_2: Mechanical 13 "Check the physical device before using the layout." at 110.338,47.819 h0.3; Mechanical 13 "Footprint dimensions taken from a different datasheet." at 110.338,48.429 h0.3
S5_3: Mechanical 13 "Check the physical device before using the layout." at 110.846,147.641 h0.3; Mechanical 13 "Footprint dimensions taken from a different datasheet." at 110.846,148.251 h0.3
S6: Mechanical 13 "Footprint dimensions taken from a different datasheet." at 19.279,49.064 h0.3; Mechanical 13 "Check the physical device before using the layout." at 19.279,48.454 h0.3
S6_1: Mechanical 13 "Check the physical device before using the layout." at 19.66,147.895 h0.3; Mechanical 13 "Footprint dimensions taken from a different datasheet." at 19.66,148.505 h0.3
S6_2: Mechanical 13 "Check the physical device before using the layout." at 127.61,47.946 h0.3; Mechanical 13 "Footprint dimensions taken from a different datasheet." at 127.61,48.556 h0.3
S6_3: Mechanical 13 "Check the physical device before using the layout." at 128.118,147.768 h0.3; Mechanical 13 "Footprint dimensions taken from a different datasheet." at 128.118,148.378 h0.3
S7: Mechanical 13 "Footprint dimensions taken from a different datasheet." at 36.678,49.191 h0.3; Mechanical 13 "Check the physical device before using the layout." at 36.678,48.581 h0.3
S7_1: Mechanical 13 "Check the physical device before using the layout." at 37.059,148.022 h0.3; Mechanical 13 "Footprint dimensions taken from a different datasheet." at 37.059,148.632 h0.3
S7_2: Mechanical 13 "Check the physical device before using the layout." at 145.009,48.073 h0.3; Mechanical 13 "Footprint dimensions taken from a different datasheet." at 145.009,48.683 h0.3
S7_3: Mechanical 13 "Check the physical device before using the layout." at 145.517,147.895 h0.3; Mechanical 13 "Footprint dimensions taken from a different datasheet." at 145.517,148.505 h0.3
S8: Mechanical 13 "Check the physical device before using the layout." at 53.95,48.2 h0.3; Mechanical 13 "Footprint dimensions taken from a different datasheet." at 53.95,48.81 h0.3
S8_1: Mechanical 13 "Check the physical device before using the layout." at 54.331,147.641 h0.3; Mechanical 13 "Footprint dimensions taken from a different datasheet." at 54.331,148.251 h0.3
S8_2: Mechanical 13 "Check the physical device before using the layout." at 162.281,47.692 h0.3; Mechanical 13 "Footprint dimensions taken from a different datasheet." at 162.281,48.302 h0.3
S8_3: Mechanical 13 "Check the physical device before using the layout." at 162.789,147.514 h0.3; Mechanical 13 "Footprint dimensions taken from a different datasheet." at 162.789,148.124 h0.3
S9: Mechanical 13 "Footprint dimensions taken from a different datasheet." at 1.88,38.523 h0.3; Mechanical 13 "Check the physical device before using the layout." at 1.88,37.913 h0.3
S9_1: Mechanical 13 "Check the physical device before using the layout." at 2.261,137.354 h0.3; Mechanical 13 "Footprint dimensions taken from a different datasheet." at 2.261,137.964 h0.3
S9_2: Mechanical 13 "Check the physical device before using the layout." at 110.211,37.405 h0.3; Mechanical 13 "Footprint dimensions taken from a different datasheet." at 110.211,38.015 h0.3
S9_3: Mechanical 13 "Check the physical device before using the layout." at 110.719,137.227 h0.3; Mechanical 13 "Footprint dimensions taken from a different datasheet." at 110.719,137.837 h0.3
S10: Mechanical 13 "Footprint dimensions taken from a different datasheet." at 19.152,38.269 h0.3; Mechanical 13 "Check the physical device before using the layout." at 19.152,37.659 h0.3
S10_1: Mechanical 13 "Check the physical device before using the layout." at 19.533,137.1 h0.3; Mechanical 13 "Footprint dimensions taken from a different datasheet." at 19.533,137.71 h0.3
S10_2: Mechanical 13 "Check the physical device before using the layout." at 127.483,37.151 h0.3; Mechanical 13 "Footprint dimensions taken from a different datasheet." at 127.483,37.761 h0.3
S10_3: Mechanical 13 "Check the physical device before using the layout." at 127.991,136.973 h0.3; Mechanical 13 "Footprint dimensions taken from a different datasheet." at 127.991,137.583 h0.3
S11: Mechanical 13 "Footprint dimensions taken from a different datasheet." at 36.424,38.269 h0.3; Mechanical 13 "Check the physical device before using the layout." at 36.424,37.659 h0.3
S11_1: Mechanical 13 "Check the physical device before using the layout." at 36.805,137.1 h0.3; Mechanical 13 "Footprint dimensions taken from a different datasheet." at 36.805,137.71 h0.3
S11_2: Mechanical 13 "Check the physical device before using the layout." at 144.755,37.151 h0.3; Mechanical 13 "Footprint dimensions taken from a different datasheet." at 144.755,37.761 h0.3
S11_3: Mechanical 13 "Check the physical device before using the layout." at 145.263,136.973 h0.3; Mechanical 13 "Footprint dimensions taken from a different datasheet." at 145.263,137.583 h0.3
S12: Mechanical 13 "Check the physical device before using the layout." at 53.696,37.659 h0.3; Mechanical 13 "Footprint dimensions taken from a different datasheet." at 53.696,38.269 h0.3
S12_1: Mechanical 13 "Check the physical device before using the layout." at 54.077,137.1 h0.3; Mechanical 13 "Footprint dimensions taken from a different datasheet." at 54.077,137.71 h0.3
S12_2: Mechanical 13 "Check the physical device before using the layout." at 162.027,37.151 h0.3; Mechanical 13 "Footprint dimensions taken from a different datasheet." at 162.027,37.761 h0.3
S12_3: Mechanical 13 "Check the physical device before using the layout." at 162.535,136.973 h0.3; Mechanical 13 "Footprint dimensions taken from a different datasheet." at 162.535,137.583 h0.3
S13: Mechanical 13 "Footprint dimensions taken from a different datasheet." at 45.085,15.113 h0.3; Mechanical 13 "Check the physical device before using the layout." at 2.007,26.61 h0.3
S13_1: Mechanical 13 "Check the physical device before using the layout." at 2.388,126.051 h0.3; Mechanical 13 "Footprint dimensions taken from a different datasheet." at 2.388,126.661 h0.3
S13_2: Mechanical 13 "Check the physical device before using the layout." at 110.338,26.102 h0.3; Mechanical 13 "Footprint dimensions taken from a different datasheet." at 110.338,26.712 h0.3
S13_3: Mechanical 13 "Check the physical device before using the layout." at 110.846,125.924 h0.3; Mechanical 13 "Footprint dimensions taken from a different datasheet." at 110.846,126.534 h0.3
S14: Mechanical 13 "Footprint dimensions taken from a different datasheet." at 19.279,27.22 h0.3; Mechanical 13 "Check the physical device before using the layout." at 19.279,26.61 h0.3
S14_1: Mechanical 13 "Check the physical device before using the layout." at 19.66,126.051 h0.3; Mechanical 13 "Footprint dimensions taken from a different datasheet." at 19.66,126.661 h0.3
S14_2: Mechanical 13 "Check the physical device before using the layout." at 127.61,26.102 h0.3; Mechanical 13 "Footprint dimensions taken from a different datasheet." at 127.61,26.712 h0.3
S14_3: Mechanical 13 "Check the physical device before using the layout." at 128.118,125.924 h0.3; Mechanical 13 "Footprint dimensions taken from a different datasheet." at 128.118,126.534 h0.3
S15: Mechanical 13 "Footprint dimensions taken from a different datasheet." at 36.551,27.093 h0.3; Mechanical 13 "Check the physical device before using the layout." at 36.551,26.483 h0.3
S15_1: Mechanical 13 "Check the physical device before using the layout." at 36.932,125.924 h0.3; Mechanical 13 "Footprint dimensions taken from a different datasheet." at 36.932,126.534 h0.3
S15_2: Mechanical 13 "Check the physical device before using the layout." at 144.882,25.975 h0.3; Mechanical 13 "Footprint dimensions taken from a different datasheet." at 144.882,26.585 h0.3
S15_3: Mechanical 13 "Check the physical device before using the layout." at 145.39,125.797 h0.3; Mechanical 13 "Footprint dimensions taken from a different datasheet." at 145.39,126.407 h0.3
S16: Mechanical 13 "Check the physical device before using the layout." at 53.823,26.102 h0.3; Mechanical 13 "Footprint dimensions taken from a different datasheet." at 53.823,26.712 h0.3
S16_1: Mechanical 13 "Check the physical device before using the layout." at 54.204,125.543 h0.3; Mechanical 13 "Footprint dimensions taken from a different datasheet." at 54.204,126.153 h0.3
S16_2: Mechanical 13 "Check the physical device before using the layout." at 162.154,25.594 h0.3; Mechanical 13 "Footprint dimensions taken from a different datasheet." at 162.154,26.204 h0.3
S16_3: Mechanical 13 "Check the physical device before using the layout." at 162.662,125.416 h0.3; Mechanical 13 "Footprint dimensions taken from a different datasheet." at 162.662,126.026 h0.3